# EAGLE board placa (EAGLE 5.01)
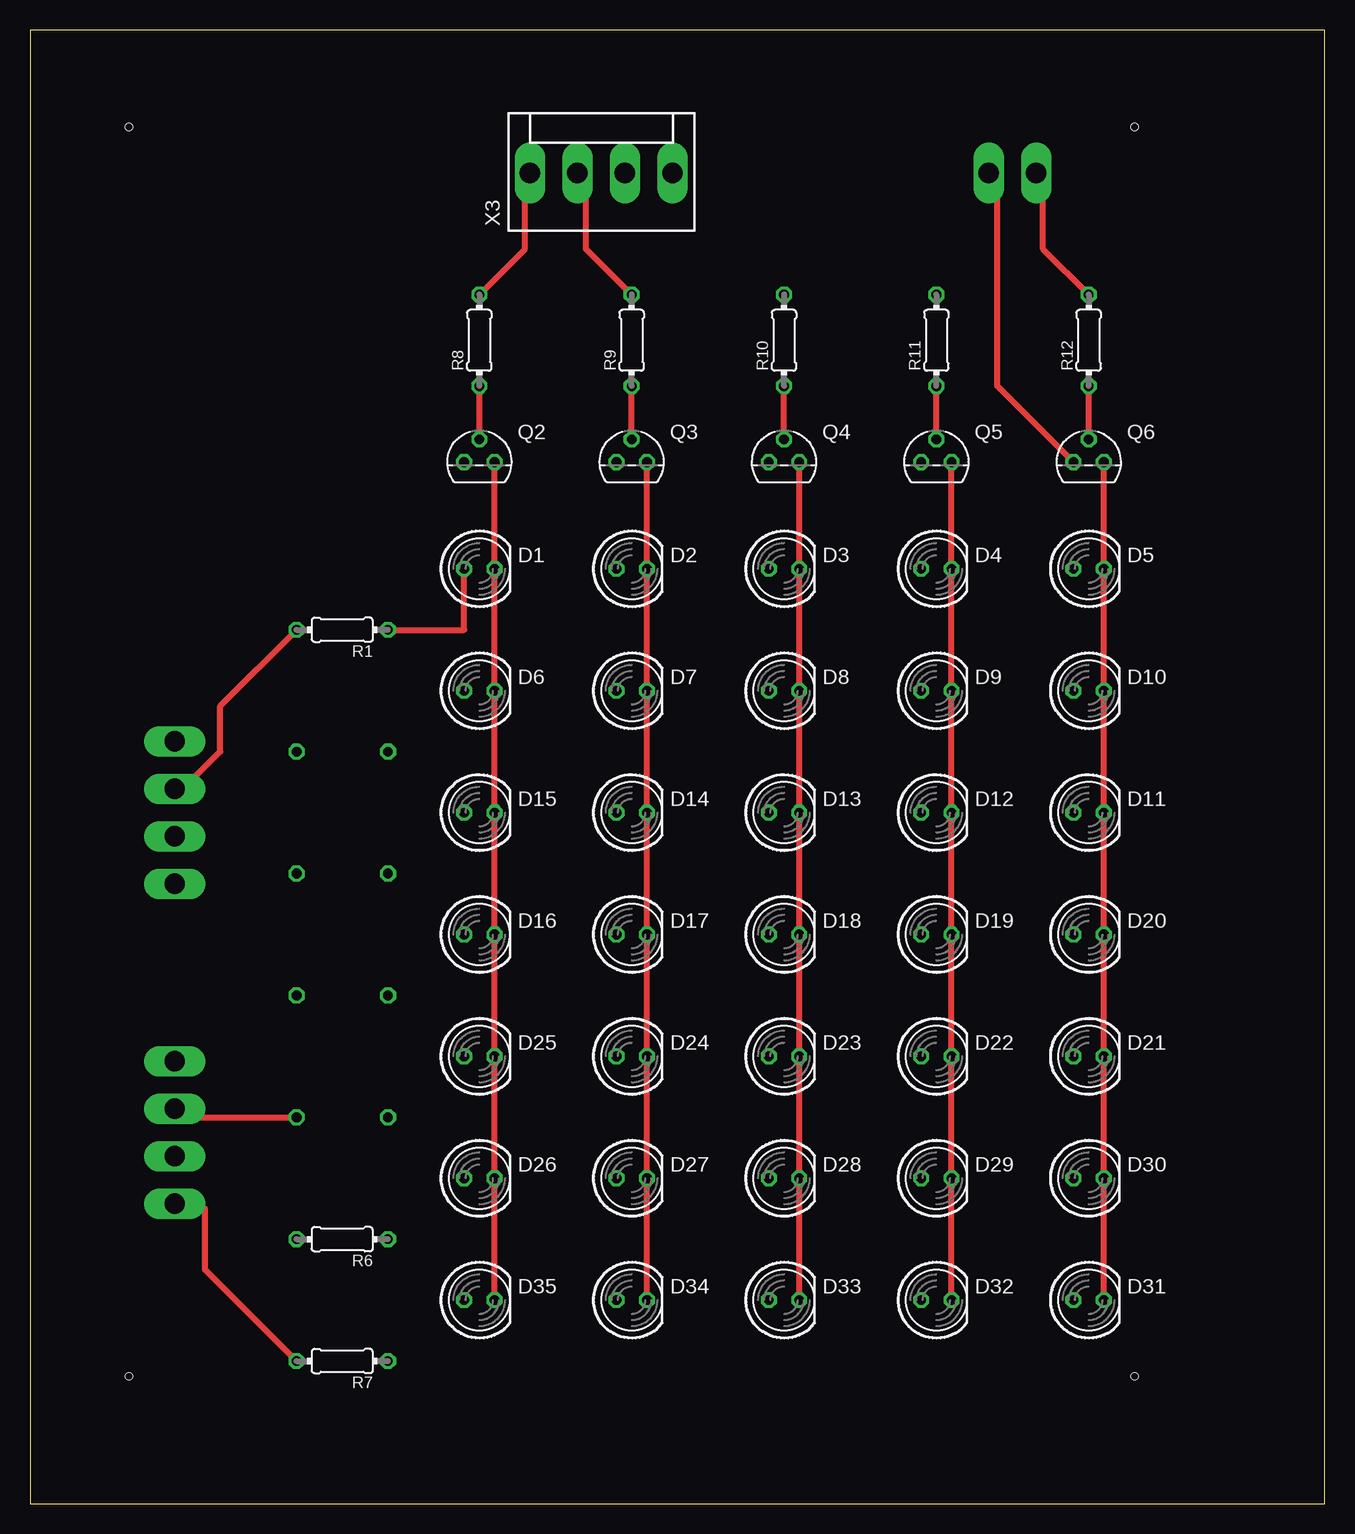
[diagram p0: board, top side]
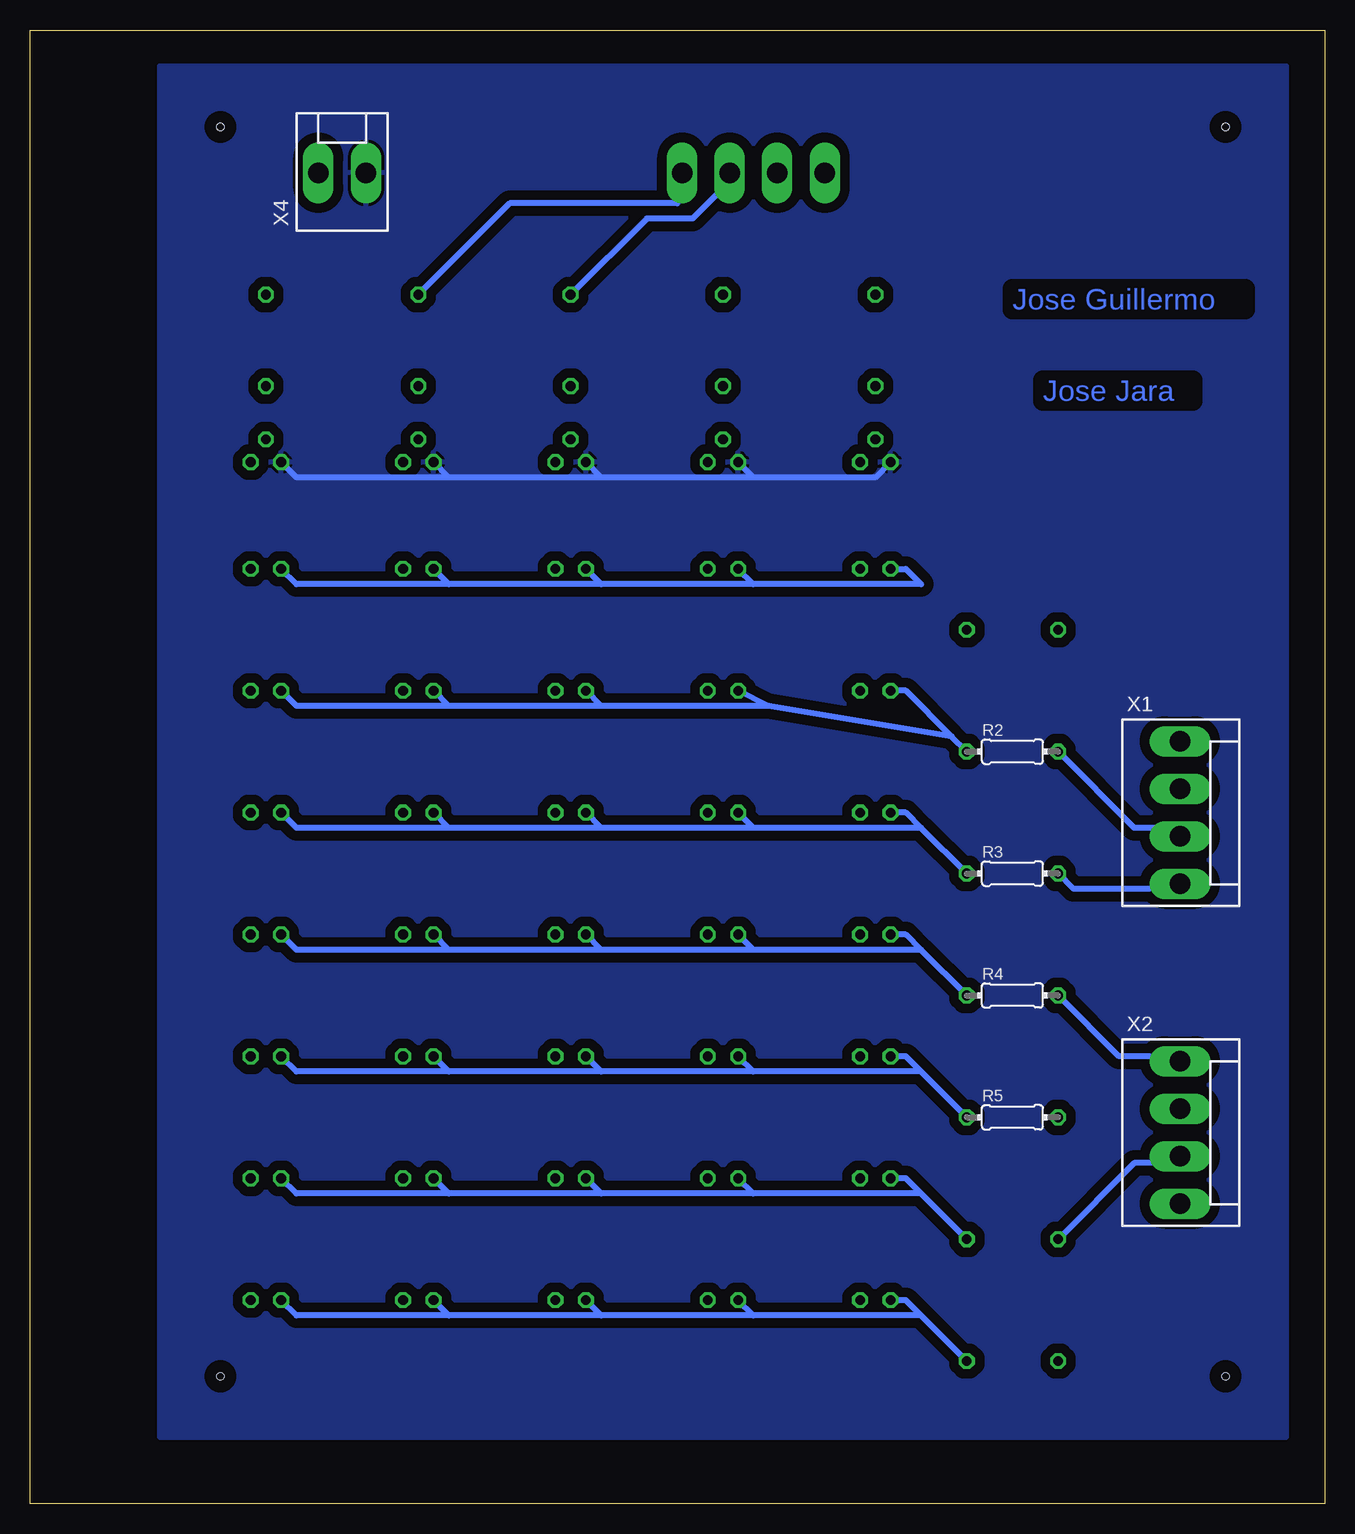
[diagram p1: board, bottom side, seen from below]

Size 107.93 x 122.86 mm. Coordinates in mm from the lower left corner, seen from the top.
Outline: 0,0 107.93,0 107.93,122.86 0,122.86 0,0
Copper layers (1*16): Top 0.035mm / dielectric 1.5mm / Bottom 0.035mm
Design rules "default *": minimum track width 20mil, minimum drill 24mil, track to track 8mil, track to pad 8mil, pad to pad 8mil, via to via 8mil, smd to smd 8mil, copper to edge 40mil, drill to drill 8mil, minimum pad ring 10mil, minimum via ring 8mil, stop-mask expansion 4mil, vias tented up to drill 0mil, thermal gap 10mil
Holes 0.6 mm at 8.25,114.77 92.07,114.77 92.07,10.63 8.25,10.63

## Footprints (pad centres in the part's own frame; a part is rotated, then mirrored left to right if it is on the bottom)
LED5MM = drill 0.813 octagon: A -1.27,0; K 1.27,0
TO92D = drill 0.813 octagon: B 0,1.905; C 1.27,0; E -1.27,0
0204/7 = drill 0.813 octagon: 1 -3.81,0; 2 3.81,0
KK-156-4 = drill 1.7 pad 2.184 long: 1 -5.94,0; 2 -1.98,0; 3 1.98,0; 4 5.94,0
KK-156-2 = drill 1.7 pad 2.184 long: 1 -1.98,0; 2 1.98,0

## Placement (x,y rotation side)
D1  [LED5MM]  37.46,77.94 0 top
D2  [LED5MM]  50.16,77.94 0 top
D3  [LED5MM]  62.86,77.94 0 top
D4  [LED5MM]  75.56,77.94 0 top
D5  [LED5MM]  88.26,77.94 0 top
D6  [LED5MM]  37.46,67.78 0 top
D7  [LED5MM]  50.16,67.78 0 top
D8  [LED5MM]  62.86,67.78 0 top
D9  [LED5MM]  75.56,67.78 0 top
D10  [LED5MM]  88.26,67.78 0 top
D11  [LED5MM]  88.26,57.62 0 top
D12  [LED5MM]  75.56,57.62 0 top
D13  [LED5MM]  62.86,57.62 0 top
D14  [LED5MM]  50.16,57.62 0 top
D15  [LED5MM]  37.46,57.62 0 top
D16  [LED5MM]  37.46,47.46 0 top
D17  [LED5MM]  50.16,47.46 0 top
D18  [LED5MM]  62.86,47.46 0 top
D19  [LED5MM]  75.56,47.46 0 top
D20  [LED5MM]  88.26,47.46 0 top
D21  [LED5MM]  88.26,37.3 0 top
D22  [LED5MM]  75.56,37.3 0 top
D23  [LED5MM]  62.86,37.3 0 top
D24  [LED5MM]  50.16,37.3 0 top
D25  [LED5MM]  37.46,37.3 0 top
D26  [LED5MM]  37.46,27.14 0 top
D27  [LED5MM]  50.16,27.14 0 top
D28  [LED5MM]  62.86,27.14 0 top
D29  [LED5MM]  75.56,27.14 0 top
D30  [LED5MM]  88.26,27.14 0 top
D31  [LED5MM]  88.26,16.98 0 top
D32  [LED5MM]  75.56,16.98 0 top
D33  [LED5MM]  62.86,16.98 0 top
D34  [LED5MM]  50.16,16.98 0 top
D35  [LED5MM]  37.46,16.98 0 top
Q2  [TO92D]  37.46,86.83 0 top
Q3  [TO92D]  50.16,86.83 0 top
Q4  [TO92D]  62.86,86.83 0 top
Q5  [TO92D]  75.56,86.83 0 top
Q6  [TO92D]  88.26,86.83 0 top
R1  [0204/7]  26.03,72.86 180 top
R2  [0204/7]  26.03,62.7 0 bottom
R3  [0204/7]  26.03,52.54 0 bottom
R4  [0204/7]  26.03,42.38 0 bottom
R5  [0204/7]  26.03,32.22 0 bottom
R6  [0204/7]  26.03,22.06 180 top
R7  [0204/7]  26.03,11.9 180 top
R8  [0204/7]  37.46,96.99 90 top
R9  [0204/7]  50.16,96.99 90 top
R10  [0204/7]  62.86,96.99 90 top
R11  [0204/7]  75.56,96.99 90 top
R12  [0204/7]  88.26,96.99 90 top
X1  [KK-156-4]  12.06,57.62 270 bottom
X2  [KK-156-4]  12.06,30.95 270 bottom
X3  [KK-156-4]  47.62,110.96 0 top
X4  [KK-156-2]  81.91,110.96 0 bottom

## Library data of the parts
D1-D35 = led
Q2-Q6 = transistor-small-signal
R1-R12 = resistor
X1-X4 = con-molex

## Nets
GND: Q2.E Q3.E Q4.E Q5.E Q6.E X4.2
N$2: D6.A D7.A D8.A D9.A D10.A R2.1
N$3: D11.A D12.A D13.A D14.A D15.A R3.1
N$4: D16.A D17.A D18.A D19.A D20.A R4.1
N$5: D21.A D22.A D23.A D24.A D25.A R5.1
N$6: D26.A D27.A D28.A D29.A D30.A R6.1
N$7: D31.A D32.A D33.A D34.A D35.A R7.1
N$8: D1.K D6.K D15.K D16.K D25.K D26.K D35.K Q2.C
N$9: D2.K D7.K D14.K D17.K D24.K D27.K D34.K Q3.C
N$10: D3.K D8.K D13.K D18.K D23.K D28.K D33.K Q4.C
N$11: D4.K D9.K D12.K D19.K D22.K D29.K D32.K Q5.C
N$12: D5.K D10.K D11.K D20.K D21.K D30.K D31.K Q6.C
N$13: R7.2 X2.4
N$14: R6.2 X2.3
N$15: R5.2 X2.2
N$16: R4.2 X2.1
N$17: R3.2 X1.4
N$18: R2.2 X1.3
N$19: R1.2 X1.2
N$20: R8.2 X3.1
N$21: R9.2 X3.2
N$22: R10.2 X3.3
N$23: R11.2 X3.4
N$24: R12.2 X4.1
N$25: Q2.B R8.1
N$26: Q3.B R9.1
N$27: Q4.B R10.1
N$28: Q5.B R11.1
N$29: Q6.B R12.1
N$30: D1.A D2.A D3.A D4.A D5.A R1.1

## Tracks (layer width: path | path; a pad name or v marks a point on that pad's centre or on a via)
GND
  Top 0.508: Q6.E 80.64,93.18 80.64,109.69 X4.2
  Bottom 0.508: Q2.E 37.46,85.56 47.62,85.56 | 47.62,85.56 Q3.E | 60.32,85.56 Q4.E | 47.62,85.56 60.32,85.56 | 73.02,85.56 Q5.E | 60.32,85.56 73.02,85.56 | X4.2 80.64,109.69 | Q6.E 85.72,85.56 73.02,85.56
  pour Bottom (isolate 0.813): 3.17,119.85 97.15,119.85 97.15,5.55 3.17,5.55
N$2
  Bottom 0.508: R2.1 31.11,63.97 | 31.11,63.97 34.92,67.78 D6.A | 60.32,66.51 D8.A | 46.35,66.51 60.32,66.51 | 73.02,66.51 D9.A | 60.32,66.51 73.02,66.51 | D10.A 85.72,66.51 73.02,66.51 | 46.35,66.51 D7.A | 31.11,63.97 46.35,66.51
N$3
  Bottom 0.508: 33.65,56.35 34.92,57.62 D15.A | R3.1 33.65,56.35 | 47.62,56.35 D14.A | 33.65,56.35 47.62,56.35 | 60.32,56.35 D13.A | 47.62,56.35 60.32,56.35 | 73.02,56.35 D12.A | 60.32,56.35 73.02,56.35 | D11.A 85.72,56.35 73.02,56.35
N$4
  Bottom 0.508: 33.65,46.19 34.92,47.46 D16.A | R4.1 33.65,46.19 | 47.62,46.19 D17.A | 33.65,46.19 47.62,46.19 | 60.32,46.19 D18.A | 47.62,46.19 60.32,46.19 | 73.02,46.19 D19.A | 60.32,46.19 73.02,46.19 | D20.A 85.72,46.19 73.02,46.19
N$5
  Bottom 0.508: 33.65,36.03 34.92,37.3 D25.A | R5.1 33.65,36.03 | 47.62,36.03 D24.A | 33.65,36.03 47.62,36.03 | 60.32,36.03 D23.A | 47.62,36.03 60.32,36.03 | 73.02,36.03 D22.A | 60.32,36.03 73.02,36.03 | D21.A 85.72,36.03 73.02,36.03
N$6
  Bottom 0.508: 33.65,25.87 34.92,27.14 D26.A | R6.1 33.65,25.87 | 47.62,25.87 D27.A | 33.65,25.87 47.62,25.87 | 60.32,25.87 D28.A | 47.62,25.87 60.32,25.87 | 73.02,25.87 D29.A | 60.32,25.87 73.02,25.87 | D30.A 85.72,25.87 73.02,25.87
N$7
  Bottom 0.508: 33.65,15.71 34.92,16.98 D35.A | R7.1 33.65,15.71 | 47.62,15.71 D34.A | 33.65,15.71 47.62,15.71 | 60.32,15.71 D33.A | 47.62,15.71 60.32,15.71 | 73.02,15.71 D32.A | 60.32,15.71 73.02,15.71 | D31.A 85.72,15.71 73.02,15.71
N$8
  Top 0.508: Q2.C D1.K D6.K D15.K D16.K D25.K D26.K D35.K
N$9
  Top 0.508: Q3.C D2.K D7.K D14.K D17.K D24.K D27.K D34.K
N$10
  Top 0.508: Q4.C D3.K D8.K D13.K D18.K D23.K D28.K D33.K
N$11
  Top 0.508: Q5.C D4.K D9.K D12.K D19.K D22.K D29.K D32.K
N$12
  Top 0.508: Q6.C D5.K D10.K D11.K D20.K D21.K D30.K D31.K
N$13
  Top 0.508: R7.2 14.6,19.52 14.6,24.6 X2.4
N$14
  Bottom 0.508: R6.2 15.87,28.41 13.33,28.41 X2.3
N$15
  Top 0.508: R5.2 13.33,32.22 X2.2
N$16
  Bottom 0.508: R4.2 17.14,37.3 14.6,37.3 X2.1
N$17
  Bottom 0.508: R3.2 20.95,51.27 14.6,51.27 X1.4
N$18
  Bottom 0.508: R2.2 15.87,56.35 13.33,56.35 X1.3
N$19
  Top 0.508: R1.2 15.87,66.51 15.87,62.7 13.33,60.16 X1.2
N$20
  Top 0.508: R8.2 41.27,104.61 41.27,108.42 X3.1
N$21
  Top 0.508: R9.2 46.35,104.61 46.35,109.69 X3.2
N$22
  Bottom 0.508: R10.2 56.51,107.15 52.7,107.15 50.16,109.69 X3.3
N$23
  Bottom 0.508: R11.2 67.94,108.42 53.97,108.42 X3.4
N$24
  Top 0.508: R12.2 84.45,104.61 84.45,109.69 X4.1
N$25
  Top 0.508: Q2.B R8.1
N$26
  Top 0.508: Q3.B R9.1
N$27
  Top 0.508: Q4.B R10.1
N$28
  Top 0.508: Q5.B R11.1
N$29
  Top 0.508: Q6.B R12.1
N$30
  Top 0.508: R1.1 36.19,72.86 D1.A
  Bottom 0.508: D1.A 34.92,77.94 33.65,76.67 47.62,76.67 | 47.62,76.67 D2.A | 60.32,76.67 D3.A | 47.62,76.67 60.32,76.67 | 73.02,76.67 D4.A | 60.32,76.67 73.02,76.67 | D5.A 85.72,76.67 73.02,76.67

## Text on the board
Bottom: Jose Guillermo | Jose Jara